# EAGLE board ch3 (EAGLE 9.2.2)
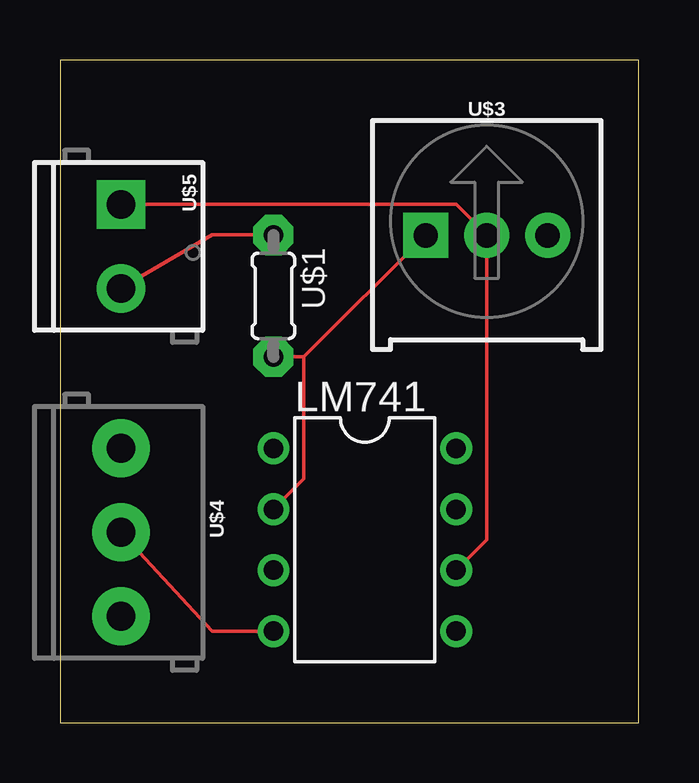
[diagram p0: board, top side]
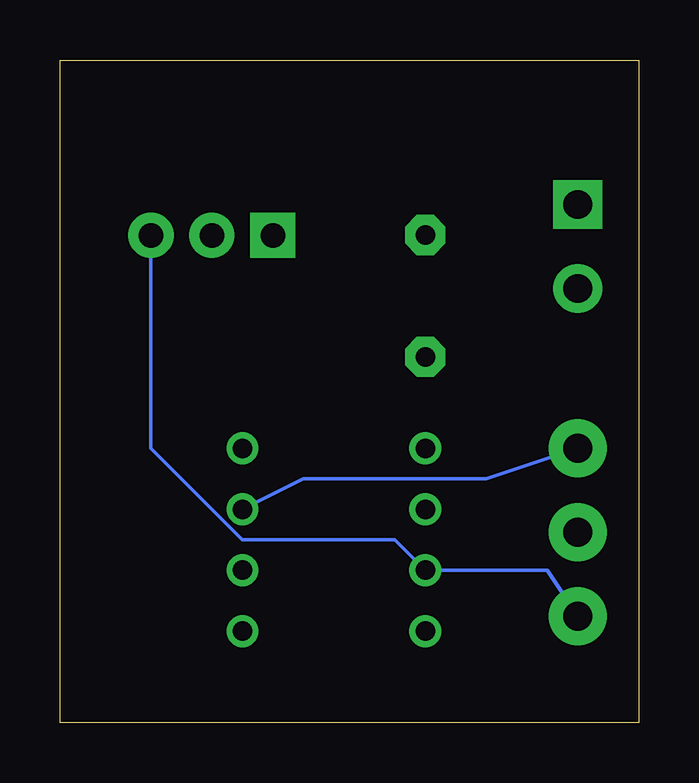
[diagram p1: board, bottom side, seen from below]

Size 24.11 x 27.61 mm. Coordinates in mm from the lower left corner, seen from the top.
Outline: 0,0 24.11,0 24.11,27.61 0,27.61 0,0
Copper layers (1*16): Top 0.035mm / dielectric 1.5mm / Bottom 0.035mm
Design rules "default": minimum track width 6mil, minimum drill 0.35mm, track to track 6mil, track to pad 6mil, pad to pad 6mil, via to via 6mil, smd to smd 6mil, copper to edge 40mil, drill to drill 6mil, minimum pad ring 10mil, minimum via ring 8mil, stop-mask expansion 4mil, vias tented up to drill 0mil, thermal gap 10mil

## Footprints (pad centres in the part's own frame; a part is rotated, then mirrored left to right if it is on the bottom)
RESISTOR = drill 0.813 pad 1.676 octagon: 1 -2.54,0; 2 2.54,0
IC-LM741 = drill 0.813 pad 1.27: 1 -3.81,-3.81; 2 -1.27,-3.81; 3 1.27,-3.81; 4 3.81,-3.81; 5 3.81,3.81; 6 1.27,3.81; 7 -1.27,3.81; 8 -3.81,3.81
POTENTIOMETER = drill 1.016 pad 1.88 square: 1 -2.54,-0.015 | drill 1.016 pad 1.88: 2 0,-0.015; 3 2.54,-0.015
TERMINAL-CONN_3 = drill 1.2 pad 2.413: 1 0,0; 2 3.5,0; 3 7,0
TERMINAL_CONN_2 = drill 1.2 pad 2.032 square: 1 0,0 | drill 1.2 pad 2.032: 2 3.5,0

## Placement (x,y rotation side)
U$1  RESISTOR  [RESISTOR]  8.89,17.78 270 top
U$2  IC-LM741  [IC-LM741]  12.7,7.62 270 top
U$3  POTENTIOMETER  [POTENTIOMETER]  17.78,20.32 0 top
U$4  TERMINAL_CONN_3  [TERMINAL-CONN_3]  2.54,11.43 270 top
U$5  TERMINAL_CONN_2  [TERMINAL_CONN_2]  2.54,21.59 270 top

## Library data of the parts
U$1-U$5 = ECE5_WS(7)

## Nets
N$1: U$1.2 U$2.2 U$3.1
N$2: U$2.6 U$3.2 U$5.1
N$3: U$2.3 U$3.3 U$4.3
N$4: U$2.4 U$4.2
N$6: U$2.7 U$4.1
N$7: U$1.1 U$5.2

## Tracks (layer width: path | path; a pad name or v marks a point on that pad's centre or on a via)
N$1
  Top 0.152: U$3.1 10.16,15.24 | 10.16,15.24 U$1.2 | 10.16,15.24 10.16,10.16 U$2.2
N$2
  Top 0.152: U$5.1 16.51,21.59 17.78,20.32 U$3.2 17.78,7.62 U$2.6
N$3
  Bottom 0.152: U$3.3 20.32,11.43 16.51,7.62 10.16,7.62 U$2.3 3.81,6.35 U$4.3
N$4
  Top 0.152: U$4.2 6.35,3.81 U$2.4
N$6
  Bottom 0.152: U$2.7 13.97,10.16 6.35,10.16 U$4.1
N$7
  Top 0.152: U$1.1 6.35,20.32 U$5.2